# EAGLE board max232 (EAGLE 5.11)
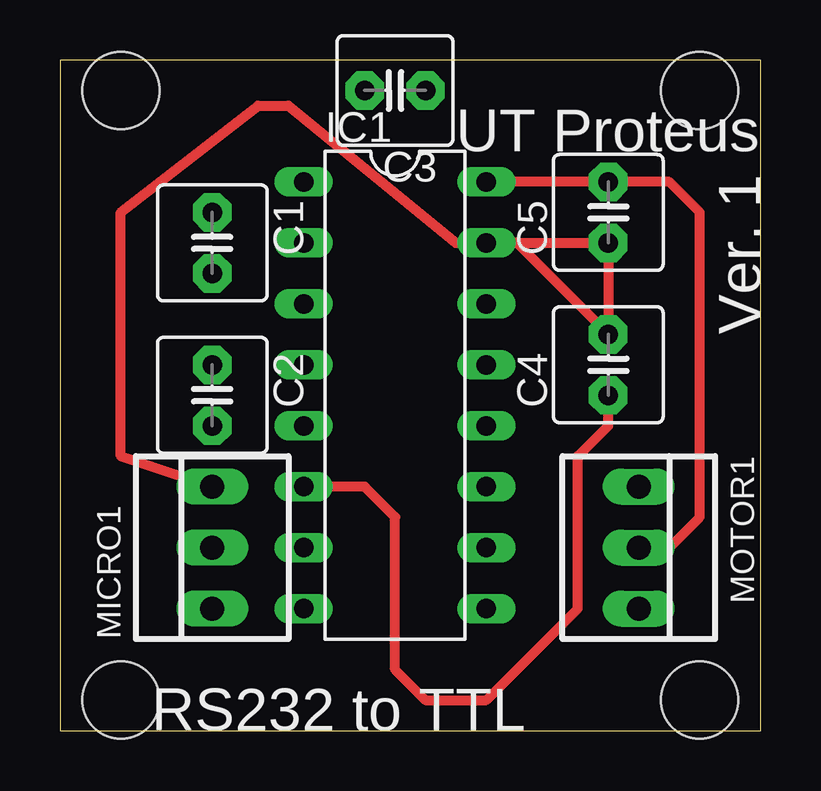
[diagram p0: board, top side]
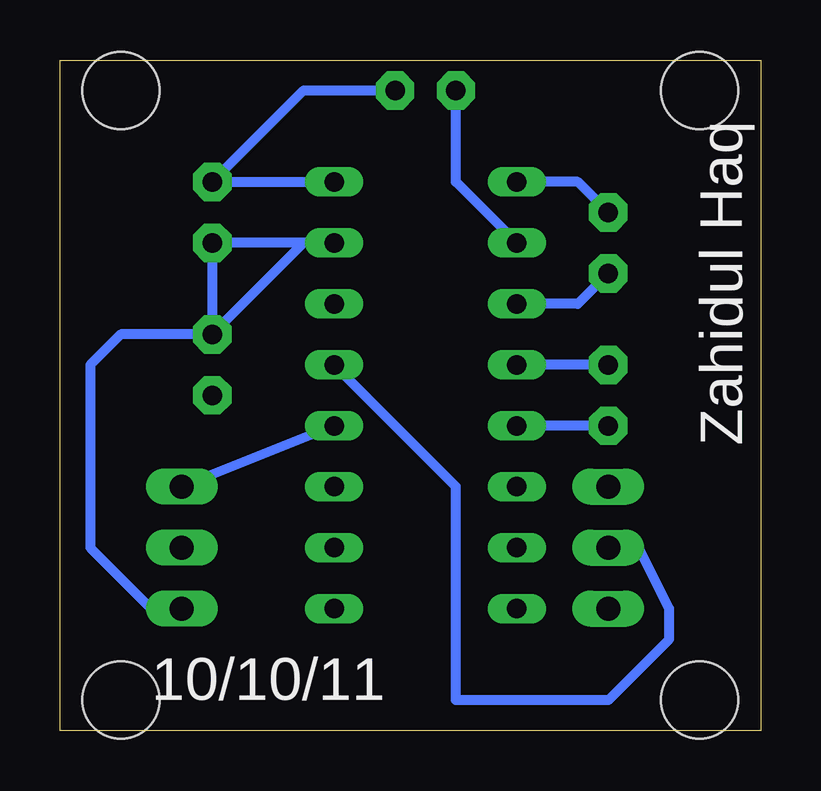
[diagram p1: board, bottom side, seen from below]

Size 29.21 x 27.94 mm. Coordinates in mm from the lower left corner, seen from the top.
Outline: 0,0 29.21,0 29.21,27.94 0,27.94 0,0
Copper layers (1*16): Top 0.0356mm / dielectric 1.5011mm / Bottom 0.0356mm
Design rules "LaenPCBOrder": minimum track width 6mil, minimum drill 13mil, track to track 6mil, track to pad 6mil, pad to pad 6mil, via to via 6mil, smd to smd 6mil, copper to edge 15mil, drill to drill 6mil, minimum pad ring 7mil, minimum via ring 7mil, stop-mask expansion 4mil, vias tented up to drill 0mil, thermal gap 10mil
Holes 3.2 mm at 2.54,26.67 2.54,1.27 26.67,1.27 26.67,26.67

## Footprints (pad centres in the part's own frame; a part is rotated, then mirrored left to right if it is on the bottom)
C2.5-5 = drill 0.813 pad 1.6 octagon: 1 -1.27,0; 2 1.27,0
DIL16 = drill 0.813 long: 1 -8.89,-3.81; 2 -6.35,-3.81; 3 -3.81,-3.81; 4 -1.27,-3.81; 5 1.27,-3.81; 6 3.81,-3.81; 7 6.35,-3.81; 8 8.89,-3.81; 9 8.89,3.81; 10 6.35,3.81; 11 3.81,3.81; 12 1.27,3.81; 13 -1.27,3.81; 14 -3.81,3.81; 15 -6.35,3.81; 16 -8.89,3.81
22-23-2031 = drill 1 long: 1 -2.54,0; 2 0,0; 3 2.54,0

## Placement (x,y rotation side)
C1  [C2.5-5]  6.35,20.32 270 top
C2  [C2.5-5]  6.35,13.97 270 top
C3  [C2.5-5]  13.97,26.67 180 top
C4  [C2.5-5]  22.86,15.24 90 top
C5  [C2.5-5]  22.86,21.59 90 top
IC1  MAX232  [DIL16]  13.97,13.97 270 top
MICRO1  22-23-2031  [22-23-2031]  6.35,7.62 90 top
MOTOR1  22-23-2031  [22-23-2031]  24.13,7.62 270 top

## Library data of the parts
C1-C5 = capacitor-wima
IC1 = maxim; MF: MAXIM; MPN: MAX232ACPE+; OC_FARNELL: 9723773; OC_NEWARK: 68K4544
MICRO1 MOTOR1 = con-molex; MF: MOLEX; MPN: 22-23-2031; OC_FARNELL: 1462950; OC_NEWARK: 30C0862

## Nets
GND: C4.2 C5.1 IC1.15 MICRO1.3 MOTOR1.3
N$1: C1.1 IC1.1
N$2: C2.1 IC1.4
N$3: C2.2 IC1.5
N$4: C1.2 IC1.3
N$5: C4.1 IC1.6
N$6: IC1.13 MICRO1.2
N$7: C3.2 IC1.2
N$9: IC1.12 MOTOR1.1
VCC: C3.1 C5.2 IC1.16 MOTOR1.2

## Tracks (layer width: path | path; a pad name or v marks a point on that pad's centre or on a via)
GND
  Top 0.406: IC1.15 16.51,20.32 9.52,26.04 8.25,26.04 2.54,21.59 2.54,11.43 MICRO1.3 | IC1.15 19.05,20.32 C4.2 C5.1 IC1.15
  Bottom 0.406: 19.05,20.32 C5.1 C4.2 | MOTOR1.3 25.4,5.08 27.94,7.62 27.94,15.24 26.67,16.51 C4.2 | IC1.15 19.05,20.32 | 19.05,20.32 C4.2
N$1
  Bottom 0.406: C1.1 7.62,22.86 IC1.1
N$2
  Bottom 0.406: C2.1 IC1.4
N$3
  Bottom 0.406: C2.2 IC1.5
N$4
  Bottom 0.406: C1.2 7.62,17.78 IC1.3
N$5
  Top 0.406: C4.1 22.86,12.7 21.59,11.43 21.59,5.08 17.78,1.27 15.24,1.27 13.97,2.54 13.97,8.89 12.7,10.16 IC1.6
N$6
  Bottom 0.406: IC1.13 12.7,10.16 12.7,1.27 6.35,1.27 3.81,3.81 3.81,5.08 5.08,7.62 MICRO1.2
N$7
  Bottom 0.406: IC1.2 12.7,22.86 C3.2
N$9
  Bottom 0.406: IC1.12 MOTOR1.1
VCC
  Top 0.406: IC1.16 C5.2 25.4,22.86 26.67,21.59 26.67,8.89 25.4,7.62 MOTOR1.2
  Bottom 0.406: C3.1 19.05,26.67 C5.2 IC1.16

## Text on the board
bPlace: 10/10/11
tNames: UT Proteus | Ver. 1 | RS232 to TTL
bNames: Zahidul Haq